# Altium PCB PDBueno.PcbDoc
Units mm, origin at the board's own origin, x right, y up, seen from the top; angles counter-clockwise.
Board outline 152.4 x 101.6 mm, 18 copper layers (F.Cu, F.Mask, B.Cu, B.Mask, F.SilkS, B.SilkS, F.Adhes, B.Adhes, F.Paste, B.Paste, Dwgs.User, Cmts.User, Eco1.User, Eco2.User, Edge.Cuts, Margin, B.CrtYd, F.CrtYd); 19 components, 3 nets, 71 pads, 5 vias.
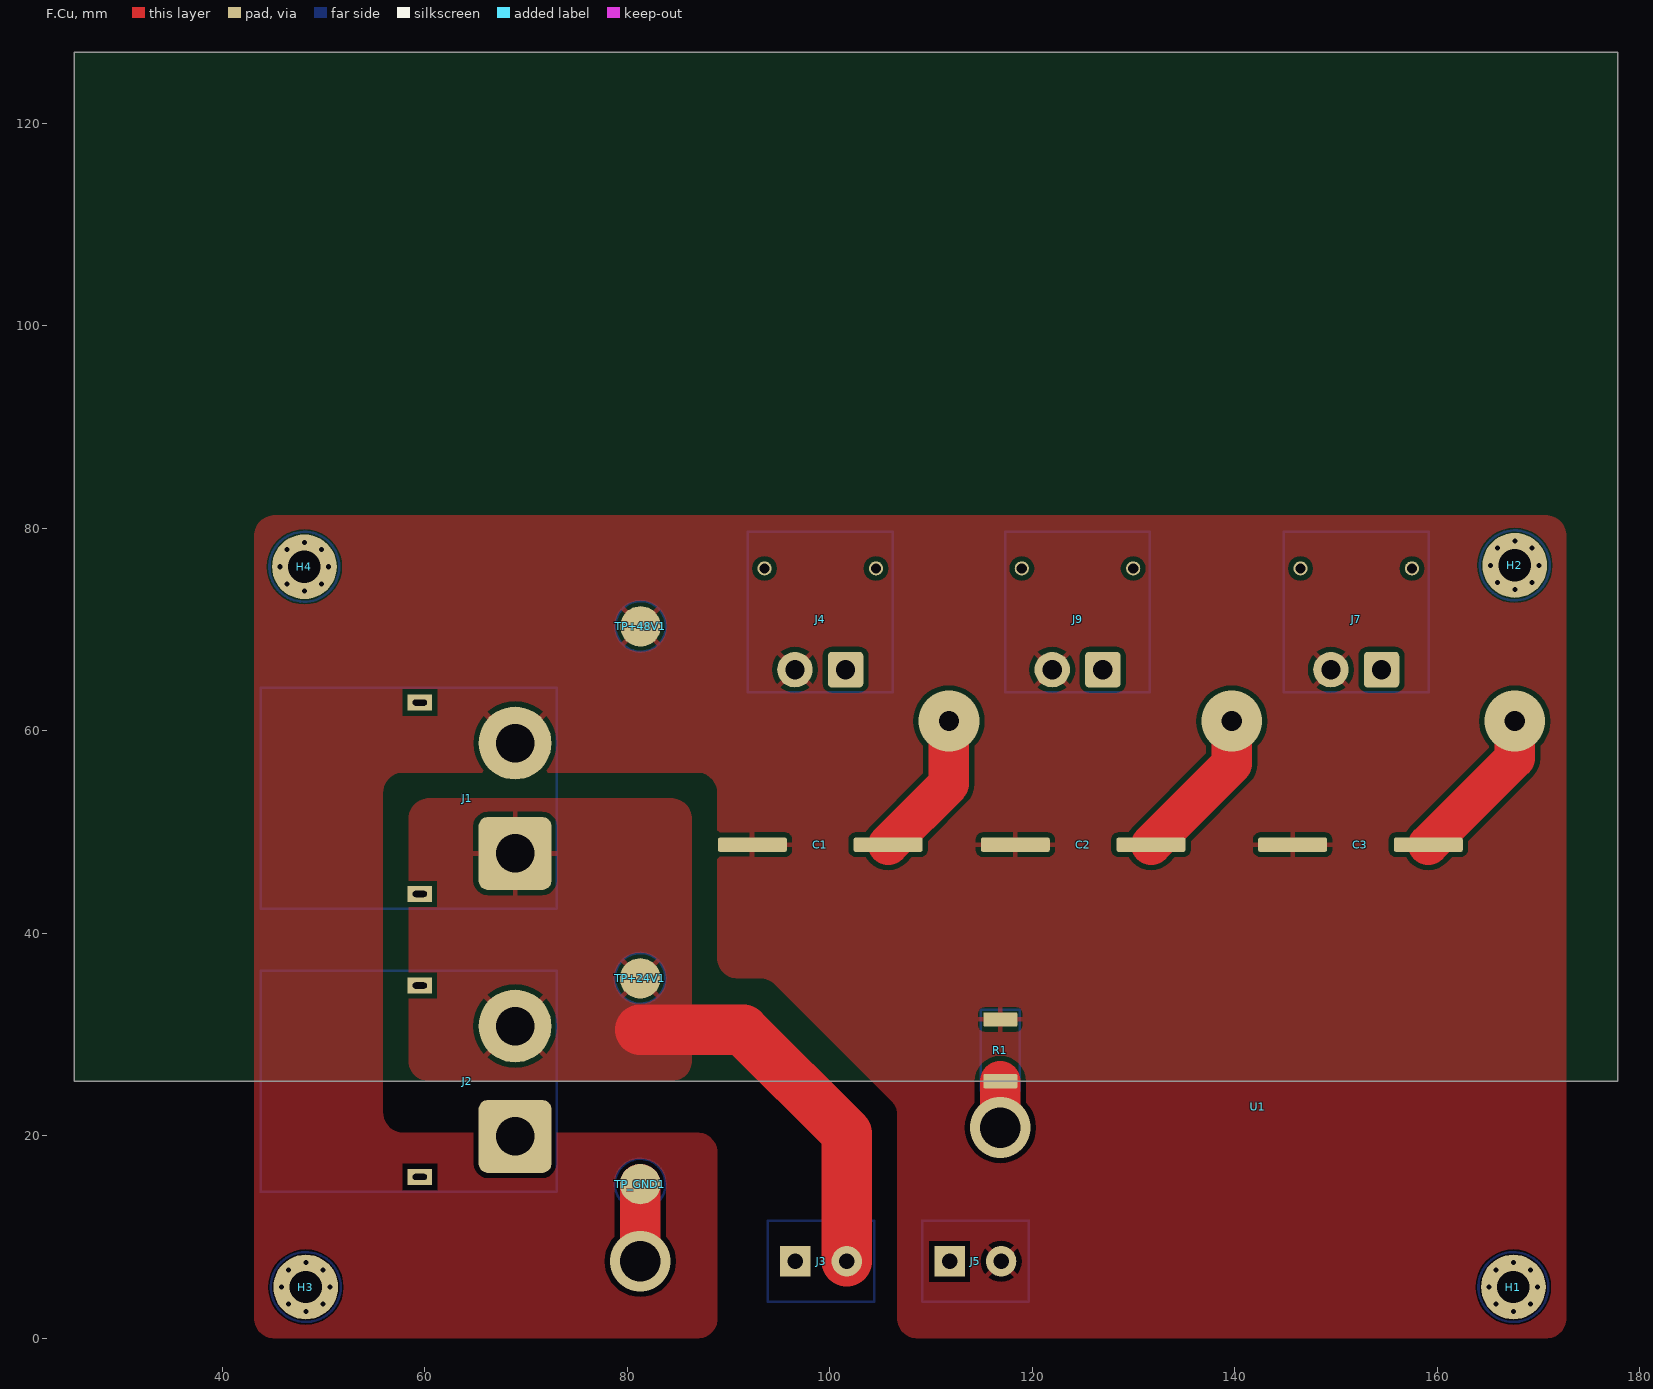
[diagram p0: F.Cu view]
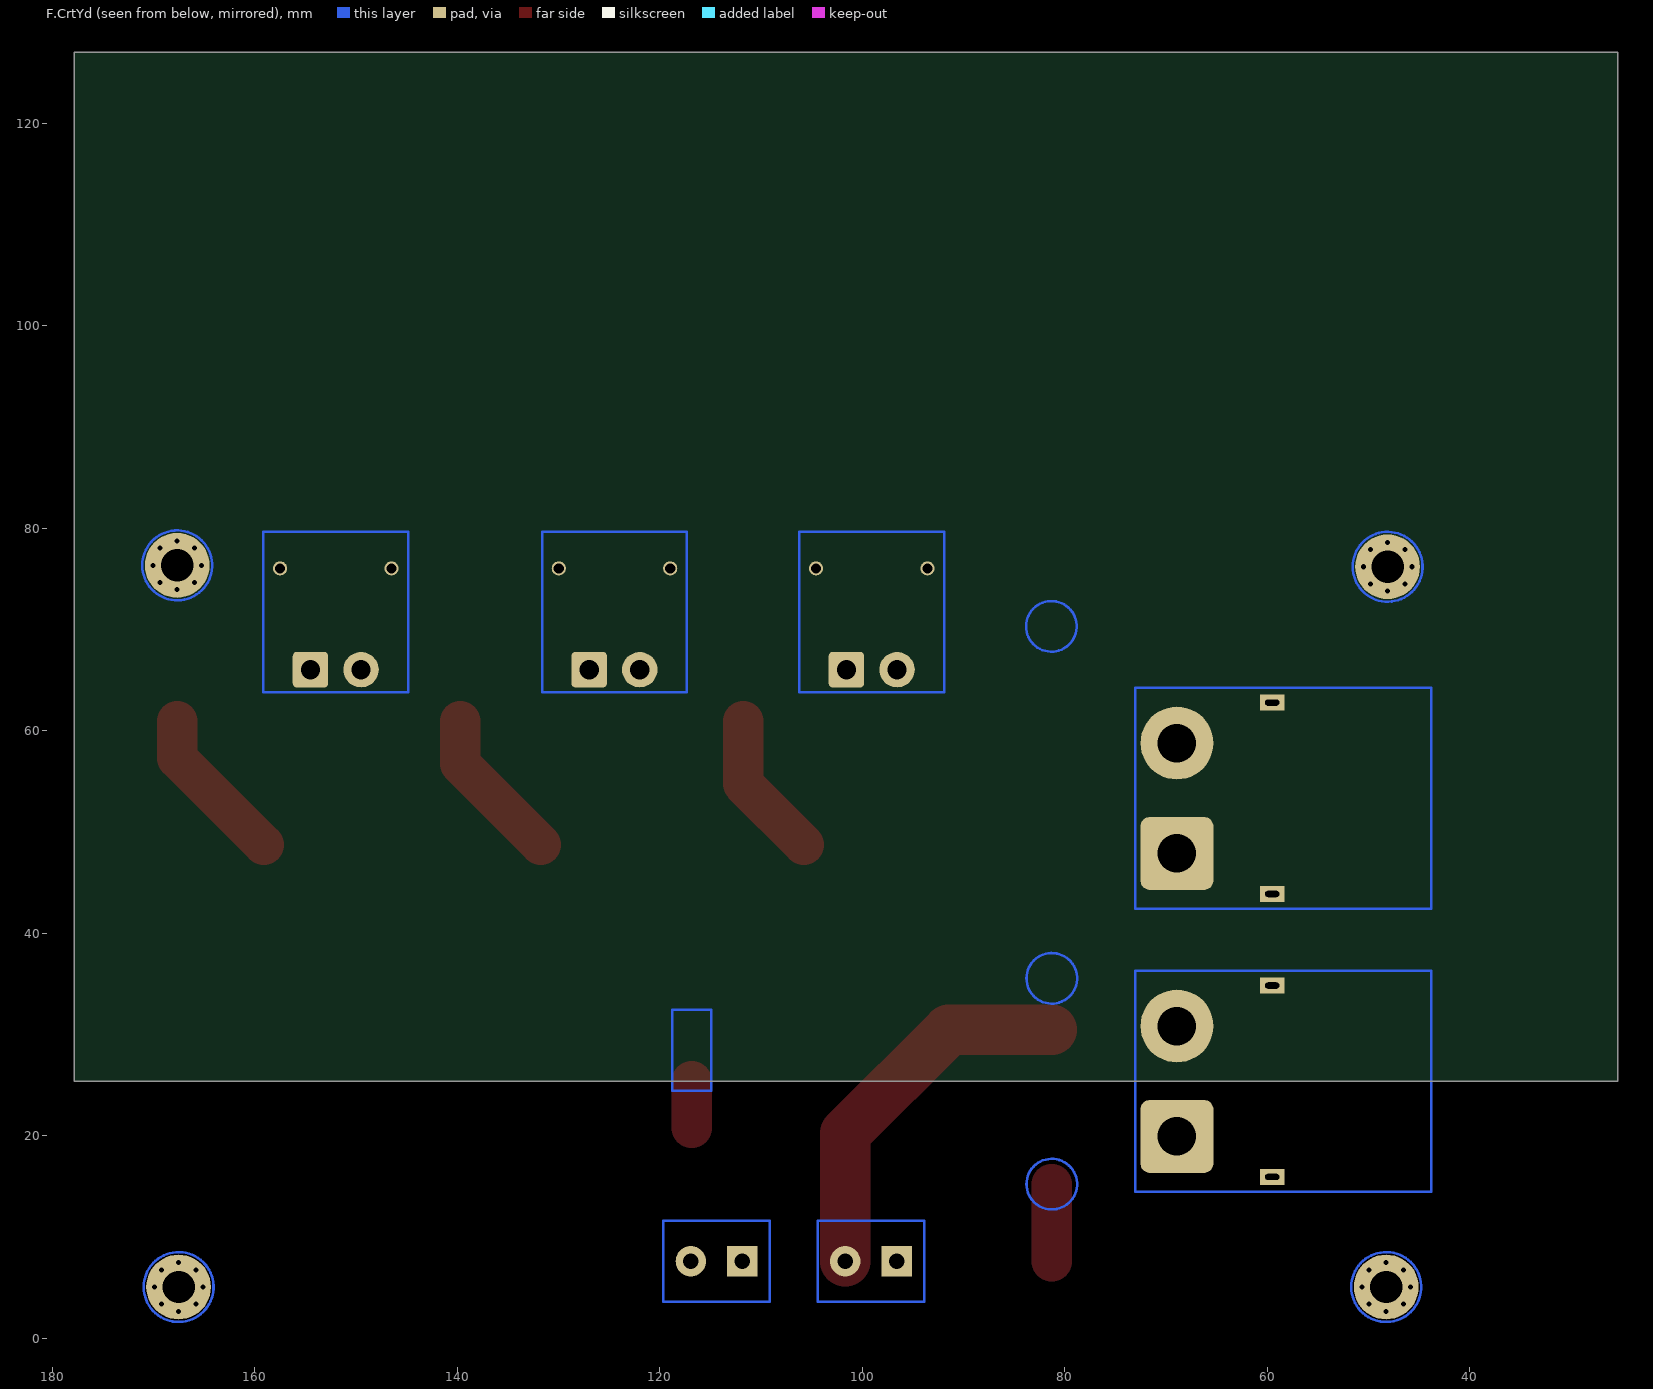
[diagram p1: F.CrtYd view, seen from below]
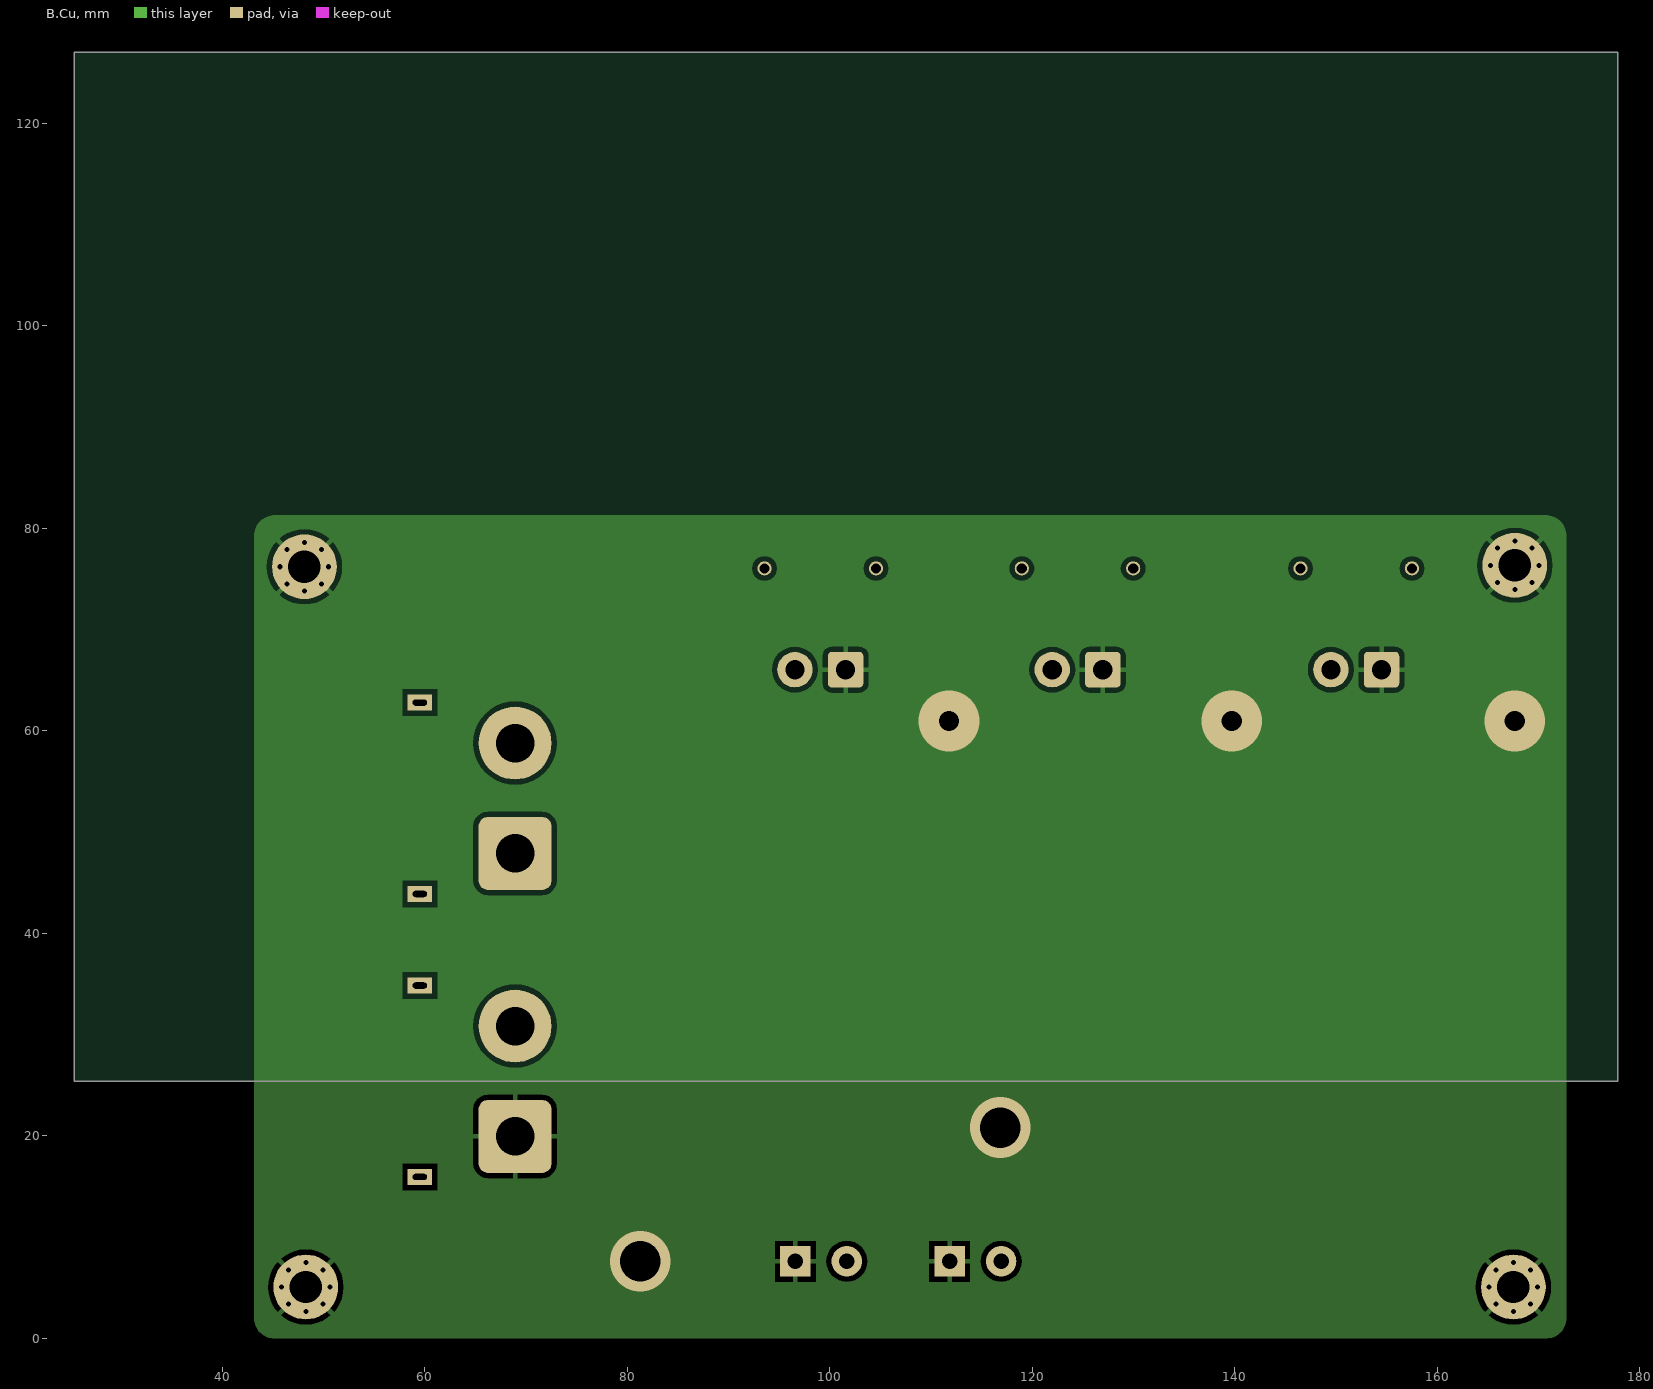
[diagram p2: B.Cu]
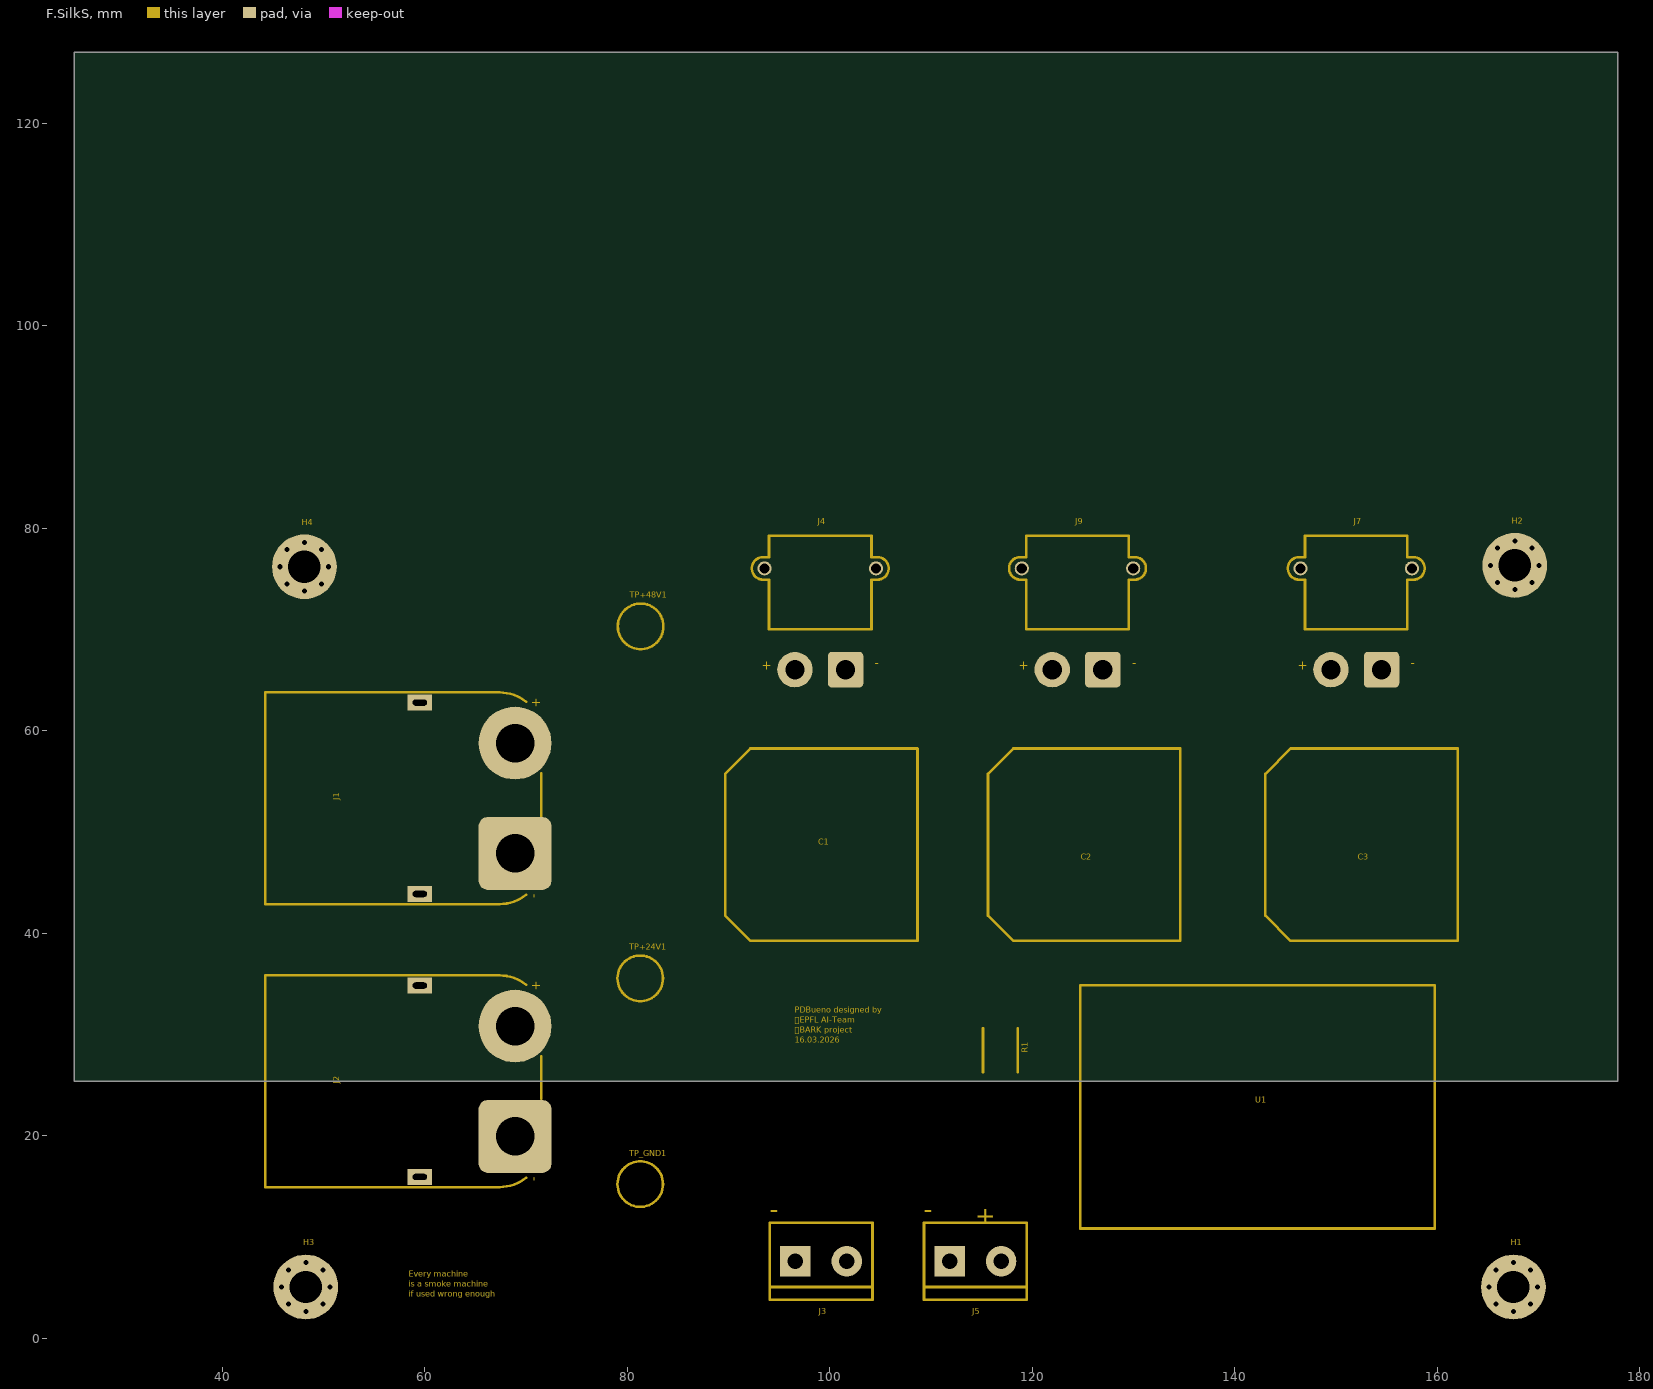
[diagram p3: F.SilkS]
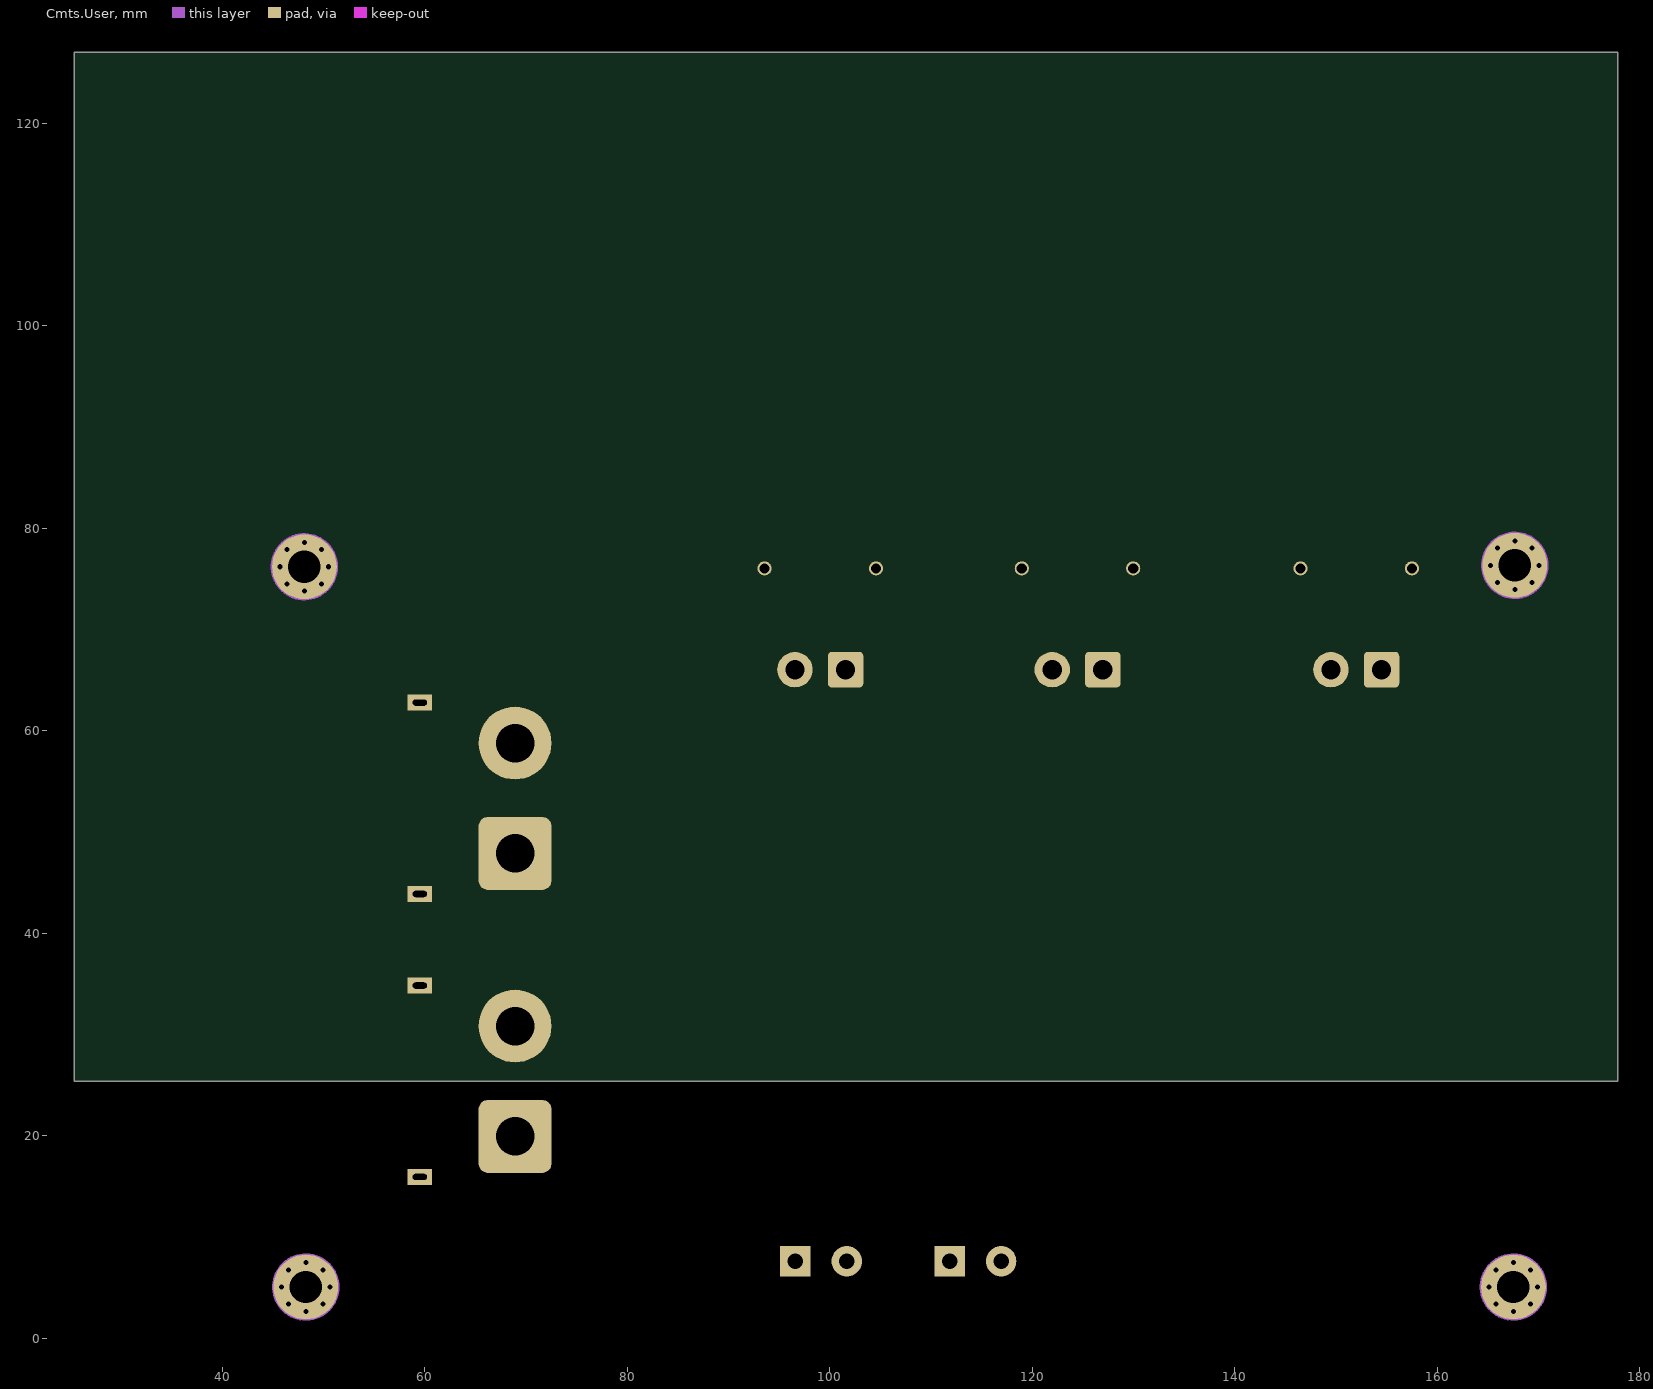
[diagram p4: Cmts.User]
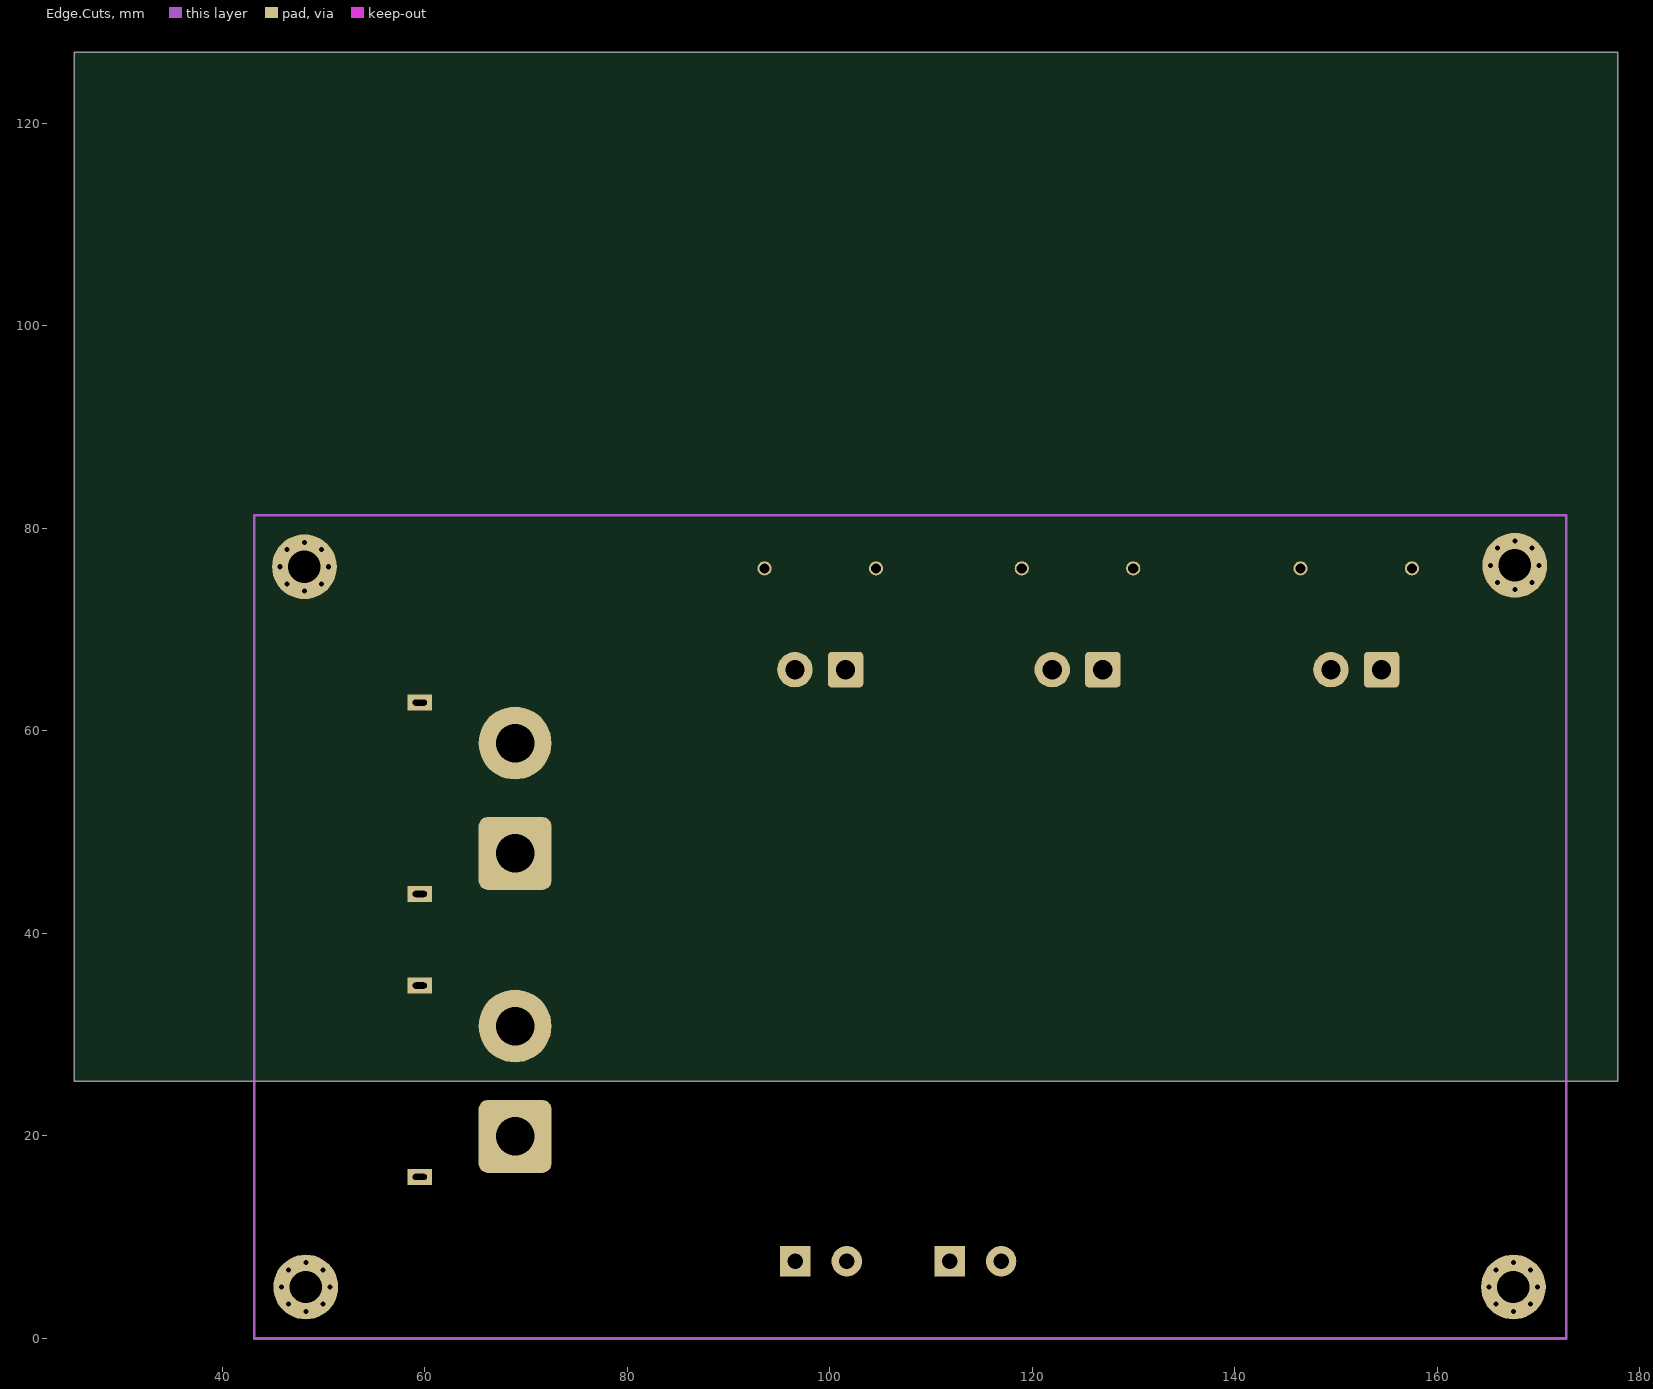
[diagram p5: Edge.Cuts]

## Layer stack, top to bottom
Top Solder: solder mask 0.0102, Solder Resist, Dk 3.5
F.Cu: signal copper 0.0356
Dielectric 1: dielectric 0.32, FR-4, Dk 4.8
F.Mask: signal copper 0.0356
Dielectric2: dielectric 0.32, FR-4, Dk 4.8
B.Cu: signal copper 0.0356
Dielectric3: dielectric 0.32, FR-4, Dk 4.8
B.Mask: signal copper 0.0356
Dielectric4: dielectric 0.32, FR-4, Dk 4.8
F.SilkS: signal copper 0.0356
Dielectric5: dielectric 0.32, FR-4, Dk 4.8
B.SilkS: signal copper 0.0356
Dielectric6: dielectric 0.32, FR-4, Dk 4.8
F.Adhes: signal copper 0.0356
Dielectric7: dielectric 0.32, FR-4, Dk 4.8
B.Adhes: signal copper 0.0356
Dielectric8: dielectric 0.32, FR-4, Dk 4.8
F.Paste: signal copper 0.0356
Dielectric9: dielectric 0.32, FR-4, Dk 4.8
B.Paste: signal copper 0.0356
Dielectric10: dielectric 0.32, FR-4, Dk 4.8
Dwgs.User: signal copper 0.0356
Dielectric11: dielectric 0.32, FR-4, Dk 4.8
Cmts.User: signal copper 0.0356
Dielectric12: dielectric 0.32, FR-4, Dk 4.8
Eco1.User: signal copper 0.0356
Dielectric13: dielectric 0.32, FR-4, Dk 4.8
Eco2.User: signal copper 0.0356
Dielectric14: dielectric 0.32, FR-4, Dk 4.8
Edge.Cuts: signal copper 0.0356
Dielectric15: dielectric 0.32, FR-4, Dk 4.8
Margin: signal copper 0.0356
Dielectric16: dielectric 0.32, FR-4, Dk 4.8
B.CrtYd: signal copper 0.0356
Dielectric17: dielectric 0.32, FR-4, Dk 4.8
F.CrtYd: signal copper 0.0356
Bottom Solder: solder mask 0.0102, Solder Resist, Dk 3.5

## Board outline
25.4,25.4 177.8,25.4 177.8,127 25.4,127

## Design rules (kind name [scope] priority, off if disabled: settings)
Clearance "Clearence 0.5_Polygon" [InNamedPolygon('F.Cu-/+48V') OR InNamedPolygon('F.Cu-/+24V') OR InNamedPolygon('B.Cu-GND')] p1: gap=0.5 ignorepadtopadclearanceinfootprint=FALSE
MinimumSolderMaskSliver [All] p1: minsoldermaskwidth=0
PolygonConnect Polygon_B.Cu-GND_ConnectDirect [IsNamedPolygon('B.Cu-GND') vs IsVia] p1: connectstyle=Direct reliefconductorwidth=0.254 reliefentries=4 polygonreliefangle="90 Angle" airgapwidth=0.254
PolygonConnect Polygon_B.Cu-GND_ConnectRelief45 [IsNamedPolygon('B.Cu-GND') vs (IsThruPin or IsSMTPin) and (PadShape_AllLayers = 'Round')] p2: connectstyle=Relief reliefconductorwidth=0.5 reliefentries=4 polygonreliefangle="45 Angle" airgapwidth=0.5
PolygonConnect Polygon_B.Cu-GND_ConnectRelief90 [IsNamedPolygon('B.Cu-GND') vs (IsThruPin or IsSMTPin) and (PadShape_AllLayers <> 'Round')] p3: connectstyle=Relief reliefconductorwidth=0.5 reliefentries=4 polygonreliefangle="90 Angle" airgapwidth=0.5
PolygonConnect Polygon_F.Cu-/+24V_ConnectDirect [IsNamedPolygon('F.Cu-/+24V') vs IsVia] p4: connectstyle=Direct reliefconductorwidth=0.254 reliefentries=4 polygonreliefangle="90 Angle" airgapwidth=0.254
PolygonConnect Polygon_F.Cu-/+24V_ConnectRelief45 [IsNamedPolygon('F.Cu-/+24V') vs (IsThruPin or IsSMTPin) and (PadShape_AllLayers = 'Round')] p5: connectstyle=Relief reliefconductorwidth=0.5 reliefentries=4 polygonreliefangle="45 Angle" airgapwidth=0.5
PolygonConnect Polygon_F.Cu-/+24V_ConnectRelief90 [IsNamedPolygon('F.Cu-/+24V') vs (IsThruPin or IsSMTPin) and (PadShape_AllLayers <> 'Round')] p6: connectstyle=Relief reliefconductorwidth=0.5 reliefentries=4 polygonreliefangle="90 Angle" airgapwidth=0.5
PolygonConnect Polygon_F.Cu-/+48V_ConnectDirect [IsNamedPolygon('F.Cu-/+48V') vs IsVia] p7: connectstyle=Direct reliefconductorwidth=0.254 reliefentries=4 polygonreliefangle="90 Angle" airgapwidth=0.254
PolygonConnect Polygon_F.Cu-/+48V_ConnectRelief45 [IsNamedPolygon('F.Cu-/+48V') vs (IsThruPin or IsSMTPin) and (PadShape_AllLayers = 'Round')] p8: connectstyle=Relief reliefconductorwidth=0.5 reliefentries=4 polygonreliefangle="45 Angle" airgapwidth=0.5
PolygonConnect Polygon_F.Cu-/+48V_ConnectRelief90 [IsNamedPolygon('F.Cu-/+48V') vs (IsThruPin or IsSMTPin) and (PadShape_AllLayers <> 'Round')] p9: connectstyle=Relief reliefconductorwidth=0.5 reliefentries=4 polygonreliefangle="90 Angle" airgapwidth=0.5
RoutingVias [All] p1: holewidth=0.711 width=1.27 viastyle="Through Hole" minholewidth=0.711 minwidth=1.27 maxholewidth=0.711 maxwidth=1.27
SilkToSilkClearance [All] p1: silktosilkclearance=0
SilkToSolderMaskClearance [IsPad] p1: minsilkscreentomaskgap=0 clearancetoexposedcopper=TRUE
SolderMaskExpansion [All] p1: expansion=0.102 istentingtop=FALSE
Width [All] p1: maxlimit=10 minlimit=0.254 preferedwidth=0.254 midlayer1_maxwidth=0.254 midlayer3_maxwidth=0.254 midlayer7_maxwidth=0.254 midlayer9_maxwidth=0.254 midlayer11_maxwidth=0.254 midlayer13_maxwidth=0.254 midlayer15_maxwidth=0.254 midlayer17_maxwidth=0.254 midlayer21_maxwidth=0.254 midlayer23_maxwidth=0.254 midlayer27_maxwidth=0.254 midlayer29_maxwidth=0.254 minimp=50.000000 maximp=50.000000 favimp=50.000000
27 further rules are at their usual default settings.

## Components (designator, comment, footprint, x,y, rotation, side; value= is the part's Value field where it differs from the comment)
C1 "Comment" VZH331M2ATR-1816 108.66,58.255 r180 top value=330uF
C2 "Comment" VZH331M2ATR-1816 134.62,58.255 r180 top value=330uF
C3 "Comment" VZH331M2ATR-1816 162,58.255 r180 top value=330uF
H1 "Comment" MountingHole_3.2mm_M3_Pad_Via 167.5,5.08 r0 top value=MountingHole_Pad
H2 "Comment" MountingHole_3.2mm_M3_Pad_Via 167.64,76.34 r0 top value=MountingHole_Pad
H3 "Comment" MountingHole_3.2mm_M3_Pad_Via 48.26,5.08 r0 top value=MountingHole_Pad
H4 "Comment" MountingHole_3.2mm_M3_Pad_Via 48.12,76.2 r0 top value=MountingHole_Pad
J1 "Comment" AMASS_XT90PW-M_1x02_P10.90mm_Horizontal 68.92,47.89 r90 top value="Battery 2"
J2 "Comment" AMASS_XT90PW-M_1x02_P10.90mm_Horizontal 68.92,19.95 r90 top value="Battery 1"
J3 "Comment" TerminalBlock_bornier-2_P5.08mm 96.6,7.62 r0 top value="Battery Buck 24V"
J4 "Comment" AMASS_XT30PW-M_1x02_P2.50mm_Horizontal 101.56,66.04 r0 top value=Screw_Terminal_01x02
J5 "Comment" TerminalBlock_bornier-2_P5.08mm 111.84,7.62 r0 top value="Battery Buck 48V"
J7 "Comment" AMASS_XT30PW-M_1x02_P2.50mm_Horizontal 154.48,66.04 r0 top value=Screw_Terminal_01x02
J9 "Comment" AMASS_XT30PW-M_1x02_P2.50mm_Horizontal 126.96,66.04 r0 top value=Screw_Terminal_01x02
R1 "Comment" R_2512_6332Metric_Pad1.40x3.35mm_HandSolder 116.84,28.45 r270 top value=100kohms
TP+24V1 "Comment" TestPoint_Pad_D4.0mm 81.28,35.56 r0 top value=TestPoint
TP+48V1 "Comment" TestPoint_Pad_D4.0mm 81.32,70.315 r0 top value=TestPoint
TP_GND1 "Comment" TestPoint_Pad_D4.0mm 81.28,15.24 r0 top value=TestPoint
U1 "Comment" BEC_Matek_12S_Pro 142.24,22.86 r0 top value="Buck Converter"

## Footprints (in the part's own frame and the unit in brackets; to place one, negate y for a bottom-side part, rotate by r counter-clockwise, add the part's x,y. Pads: shape width x height; smd on the part's side, far side on the other; paste and mask are expansions set on the pad)
AMASS_XT30PW-M_1x02_P2.50mm_Horizontal [mm]
  rrect22% 3.5x3.5 hole 1.9 paste-2539.97 mask-3.5: 1(0,0)
  round 3.5 hole 1.9 paste-2539.97 mask-3.5: 2(-5,0)
  round 1.4 hole 1 paste-2539.97 mask-1.4: Un1(-8,10) Un2(3,10)
  F.SilkS lines w0.254: -8.15,8.89 cw(c-8.15,10) -8.15,11.11 -7.56,11.11 -7.56,13.21 2.56,13.21 2.56,11.11 3.15,11.11 cw(c3.15,10) 3.15,8.89 2.56,8.89 2.56,3.99 -7.56,3.99 -7.56,8.89 -8.15,8.89
  F.CrtYd lines w0.254: -9.65,-2.25 4.65,-2.25 4.65,13.6 -9.65,13.6 -9.65,-2.25
AMASS_XT90PW-M_1x02_P10.90mm_Horizontal [mm]
  rrect25% 7.2x7.2 hole 3.8 paste-2539.97 mask-7.2: 1(0,0)
  round 7.2 hole 3.8 paste-2539.97 mask-7.2: 2(10.9,0)
  rect 1.6x2.4 hole 1.4 slot 0.6 at 0 deg paste-2539.97 mask-2.4: MP(-4,9.4) MP(14.9,9.4)
  F.SilkS lines w0.254: -4.065,-1.1 cw(c-0.855,1.523) -5,1.523 -5,24.65 15.9,24.65 15.9,1.523 cw(c11.755,1.523) 14.965,-1.1 ; 3.7,-2.6 7.9,-2.6
  F.CrtYd lines w0.254: -5.45,25.1 16.35,25.1 16.35,-4.1 -5.45,-4.1 -5.45,25.1
BEC_Matek_12S_Pro [mm]
  F.SilkS lines w0.254: -17.5,-12 17.5,-12 17.5,12 -17.5,12 -17.5,-12
MountingHole_3.2mm_M3_Pad_Via [mm]
  round 0.8 hole 0.5 paste-2539.97 mask-0.8: 1(-2.4,0) 1(-1.697,-1.697) 1(-1.697,1.697) 1(0,-2.4) 1(0,2.4) 1(1.697,-1.697) 1(1.697,1.697) 1(2.4,0)
  round 6.4 hole 3.2 paste-2539.97 mask-6.4: 1(0,0)
  Cmts.User circle w0.254: c0,0 r3.2
  F.CrtYd circle w0.254: c0,0 r3.45
R_2512_6332Metric_Pad1.40x3.35mm_HandSolder [mm]
  rrect18% 1.4x3.35 smd paste-3.35 mask-3.35: 1(-3.05,0) 2(3.05,0)
  F.SilkS lines w0.254: 2.177,-1.71 -2.177,-1.71 ; 2.177,1.71 -2.177,1.71
  F.CrtYd lines w0.254: 4,-1.92 4,1.92 -4,1.92 -4,-1.92 4,-1.92
TerminalBlock_bornier-2_P5.08mm [mm]
  rect 3x3 hole 1.52 paste-2539.97 mask-3: 1(0,0)
  round 3 hole 1.52 paste-2539.97 mask-3: 2(5.08,0)
  F.SilkS lines w0.254: -2.54,-2.54 7.62,-2.54 ; -2.54,-3.81 7.62,-3.81 7.62,3.81 -2.54,3.81 -2.54,-3.81
  F.CrtYd lines w0.254: -2.71,-4 7.79,-4 7.79,4 -2.71,4 -2.71,-4
TestPoint_Pad_D4.0mm [mm]
  round 4 smd paste-4 mask-4: 1(0,0)
  F.SilkS circle w0.254: c0,0 r2.25
  F.CrtYd circle w0.254: c0,0 r2.5
VZH331M2ATR-1816 [mm]
  rrect25% 6.8x1.4 smd paste-6.8 mask-6.8: 1(16.3,9.5) 2(2.9,9.5)
  F.SilkS lines w0.254: 19,16.5 19,2.5 16.5,0 0,0 0,19 16.5,19 19,16.5

## Part data
C1 C2 C3: library part VZH331M2ATR-1816, Description="Polarized capacitor", ki_fp_filters=CP_*
  C2: Datasheet=https://jlcpcb.com/partdetail/Lelon-VZH331M2ATR1816/C176687
H1 H2 H3 H4: library part MountingHole_3.2mm_M3_Pad_Via, "Mounting Hole 3.2mm, M3", Description="Mounting Hole with connection", ki_fp_filters=MountingHole*Pad*
J1 J2: library part AMASS_XT90PW-M_1x02_P10.90mm_Horizontal, "Connector XT90 Horizontal PCB Male  500V 30A IP40, https://www.bto.pl/pdf/09025/XT90PW-M.pdf", Description="Generic screw terminal, single row, 01x02, script generated (kicad-library-utils/schlib/autogen/connector/)", ki_fp_filters=TerminalBlock*:*
J3 J5: library part TerminalBlock_bornier-2_P5.08mm, "simple 2-pin terminal block, pitch 5.08mm, revamped version of bornier2", Description="Generic screw terminal, single row, 01x02, script generated (kicad-library-utils/schlib/autogen/connector/)", ki_fp_filters=TerminalBlock*:*
J4 J7 J9: library part AMASS_XT30PW-M_1x02_P2.50mm_Horizontal, "Connector XT30 Horizontal PCB Male, https://www.tme.eu/Document/6eb2005a51a52592b3f19e8a450c54c8/XT30PW-M.pdf", Description="Generic screw terminal, single row, 01x02, script generated (kicad-library-utils/schlib/autogen/connector/)", ki_fp_filters=TerminalBlock*:*
R1: library part R_2512_6332Metric_Pad1.40x3.35mm_HandSolder, "Resistor SMD 2512 (6332 Metric), square (rectangular) end terminal, IPC_7351 nominal with elongated pad for handsoldering. (Body size source: IPC-SM-782 page 72, https://www.pcb-3d.com/wordpress/wp-content/uploads/ipc-sm-782a_amendment_1_and_2.pdf), generated with kicad-footprint-generator", LCSC=C25717, Description=Resistor, ki_fp_filters=R_*
TP+24V1 TP+48V1 TP_GND1: library part TestPoint_Pad_D4.0mm, "SMD pad as test Point, diameter 4.0mm", Description="test point", ki_fp_filters="Pin* Test*"
U1: library part BEC_Matek_12S_Pro, ki_fp_filters=TO?263*

## Via types
v1: diameter 6, hole 2, F.Cu to B.Cu, tented both sides, 3 vias
v2: diameter 6, hole 4, F.Cu to B.Cu, tented both sides, 2 vias

## Nets (pads, with @x,y where several pads share a name; then routed paths per layer and width w, separated by ;. In a path a pad name is that pad's centre, name@x,y a point inside that pad or via, vN(x,y) a via of type N, cw(c..) or ccw(c..) an arc to the next point about the centre after c; other vN are vias at no path point)
+24V: J1.1 J2.2 J3.2 TP+24V1.1 | length 40.1
  F.Cu w0.2: J1.1@68.92,45.38 68.58,45.72 68.92,46.06 J1.1
  F.Cu w5: 81.28,30.48 91.44,30.48 101.68,20.24 J3.2
+48V: C1.1 C2.1 C3.1 J1.2 J4.2 J5.2 J7.2 J9.2 R1.1 TP+48V1.1
GND: C1.2 C2.2 C3.2 H1.1 H2.1 H3.1 H4.1 J2.1 J3.1 J4.1 J5.1 J7.1 J9.1 R1.2 TP_GND1.1 | length 58.1
  F.Cu w4: v2(81.28,7.62) TP_GND1.1 ; C1.2 111.76,54.755 v1(111.76,60.96) ; v2(116.84,20.83) R1.2 ; C2.2 139.7,56.735 v1(139.7,60.96) ; C3.2 167.64,57.295 v1(167.64,60.96)
pads on no net: J1.MP J2.MP J4.Un1 J4.Un2 J7.Un1 J7.Un2 J9.Un1 J9.Un2
copper on no net: | length 421.6
  Edge.Cuts w0.254: 43.18,0 172.72,0 172.72,81.28 43.18,81.28 43.18,0

## Polygon pours and split planes (outlines as drawn)
+24V on F.Cu "F.Cu-/+24V" (solid, remove dead copper, pour order 3): 58.42,51.34 cw(c60.42,51.34) 60.42,53.34 84.36,53.34 cw(c84.36,51.34) 86.36,51.34 86.36,27.4 cw(c84.36,27.4) 84.36,25.4 60.42,25.4 cw(c60.42,27.4) 58.42,27.4
+48V on F.Cu "F.Cu-/+48V" (solid, remove dead copper, pour order 2): 45.18,81.28 ccw(c45.18,79.28) 43.18,79.28 43.18,2 ccw(c45.18,2) 45.18,0 86.9,0 ccw(c86.9,2) 88.9,2 88.9,18.32 ccw(c86.9,18.32) 86.9,20.32 57.88,20.32 cw(c57.88,22.32) 55.88,22.32 55.88,53.88 cw(c57.88,53.88) 57.88,55.88 86.9,55.88 cw(c86.9,53.88) 88.9,53.88 88.9,37.56 ccw(c90.9,37.56) 90.9,35.56 93.152,35.56 cw(c93.152,33.56) 94.566,34.974 106.094,23.446 cw(c104.68,22.032) 106.68,22.032 106.68,2 ccw(c108.68,2) 108.68,0 170.72,0 ccw(c170.72,2) 172.72,2 172.72,79.28 ccw(c170.72,79.28) 170.72,81.28
GND on B.Cu "B.Cu-GND" (solid, remove dead copper, pour order 1): 45.18,81.28 ccw(c45.18,79.28) 43.18,79.28 43.18,2 ccw(c45.18,2) 45.18,0 170.72,0 ccw(c170.72,2) 172.72,2 172.72,79.28 ccw(c170.72,79.28) 170.72,81.28

## Other copper
F.SilkS:
  text "PDBueno designed by  / 	EPFL AI-Team  / 	BARK project / 16.03.2026" at 96.52,28.983 h1
  text "-" at 94.06,11.327 h3
  text "-" at 109.3,11.327 h3
  text "+" at 114.38,10.697 h3
  text "Every machine / is a smoke machine / if used wrong enough" at 58.42,3.919 h1

## Text inside footprints (layer, text, board x,y; h text height)
J1: F.SilkS "-" at 71.471,43.478 h1.5 r90; F.SilkS "+" at 71.714,62.296 h1.5 r90
J2: F.SilkS "-" at 71.471,15.538 h1.5 r90; F.SilkS "+" at 71.714,34.356 h1.5 r90
J4: F.SilkS "-" at 104.448,65.989 h1.5; F.SilkS "+" at 93.266,65.746 h1.5
J7: F.SilkS "-" at 157.368,65.989 h1.5; F.SilkS "+" at 146.186,65.746 h1.5
J9: F.SilkS "+" at 118.666,65.746 h1.5; F.SilkS "-" at 129.848,65.989 h1.5